# Altium PCB BOOSTXL-DRV8301.PcbDoc
Units mil, origin at the board's own origin, x right, y up, seen from the top; angles counter-clockwise.
Board outline 2200 x 2300 mil, 2 copper layers (Top, Bottom), stack 61.9 mil thick; 114 components, 81 nets, 348 pads, 370 vias.
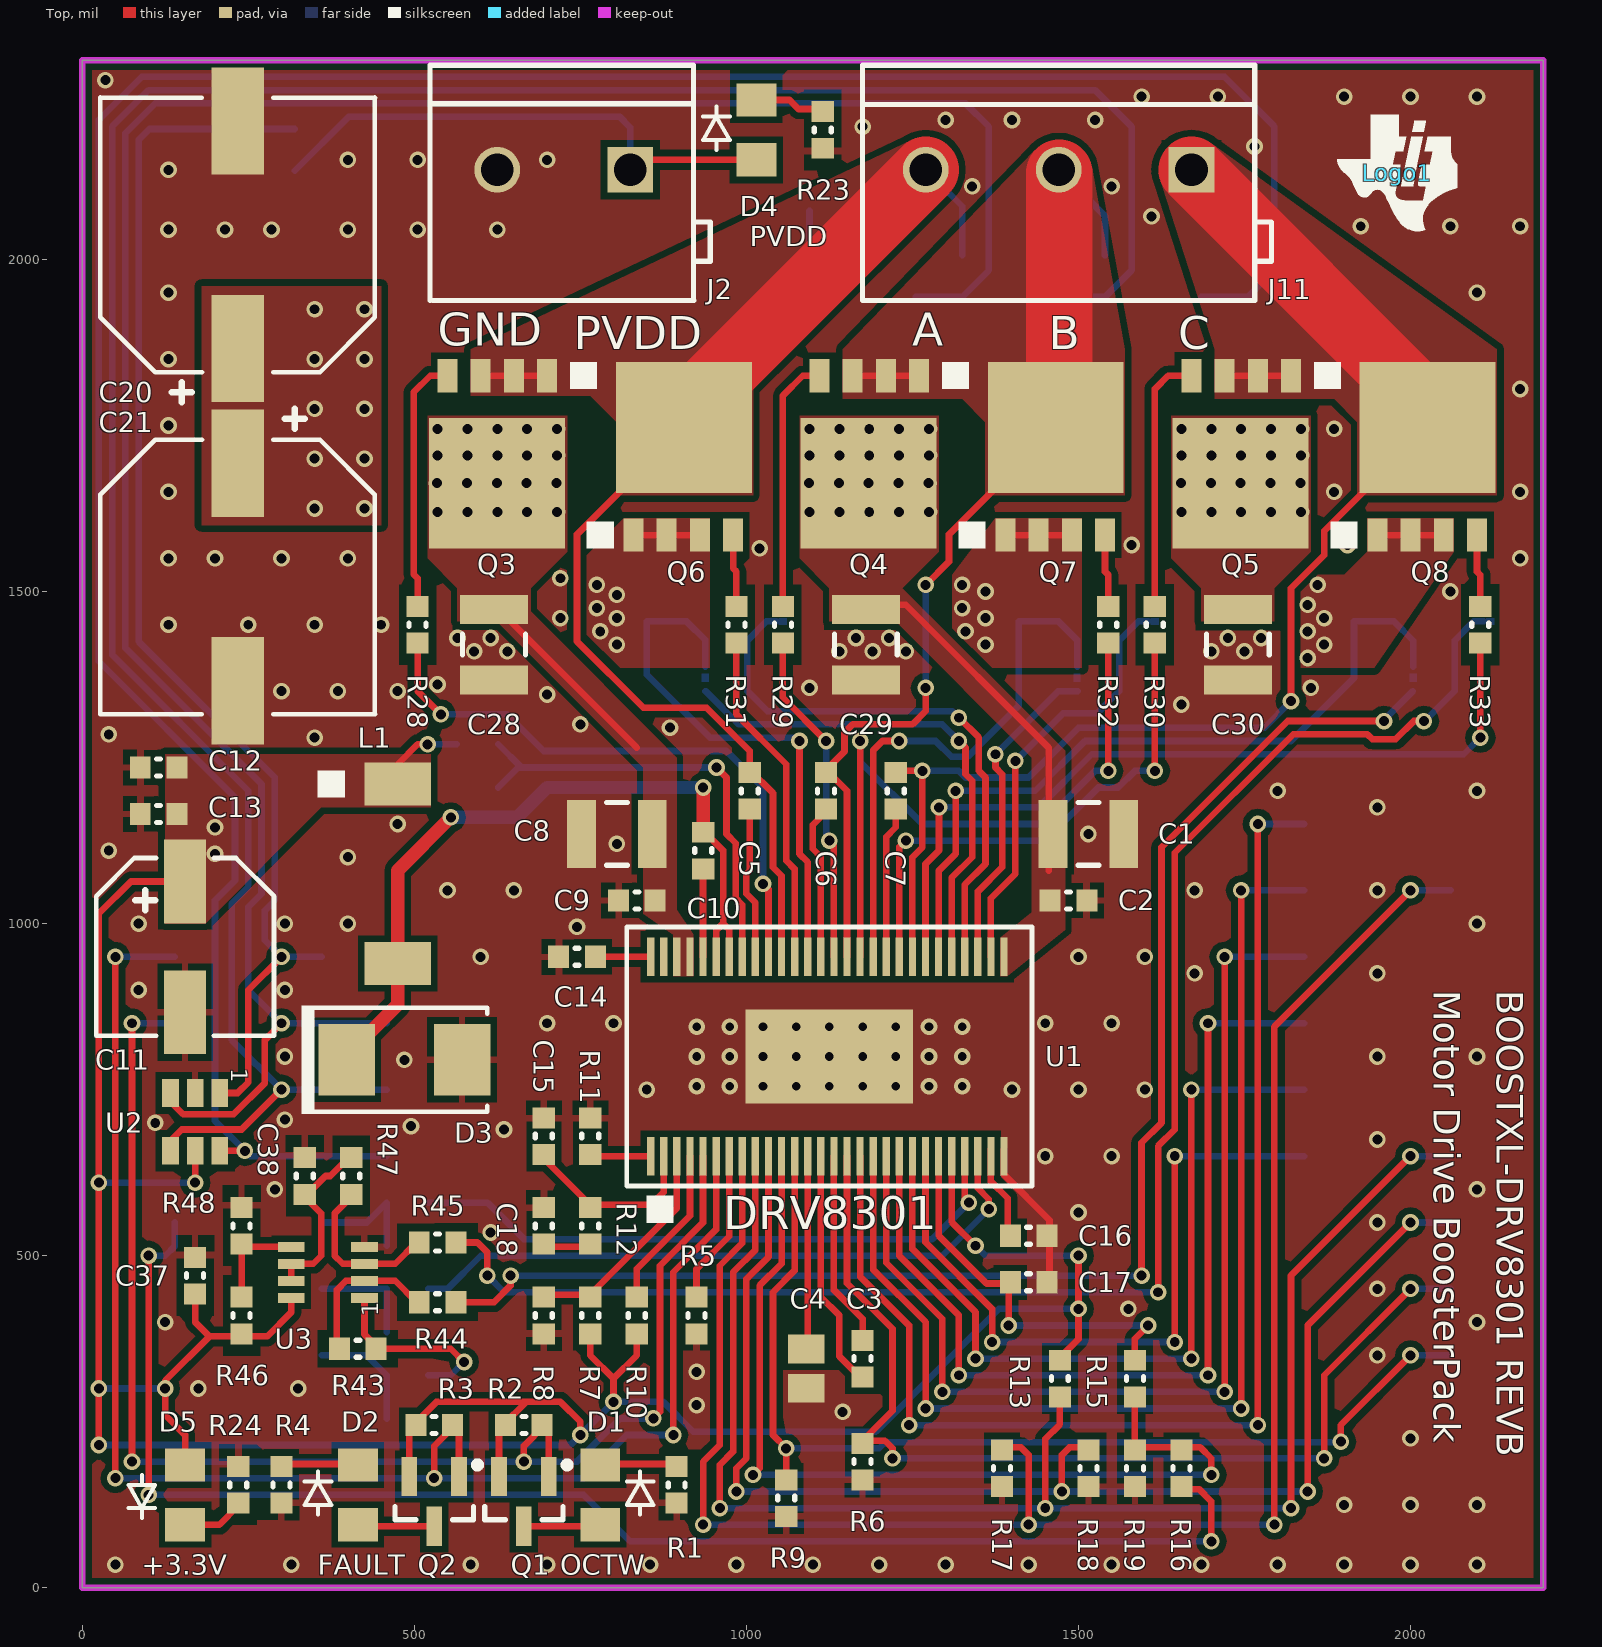
[diagram p0: Top view]
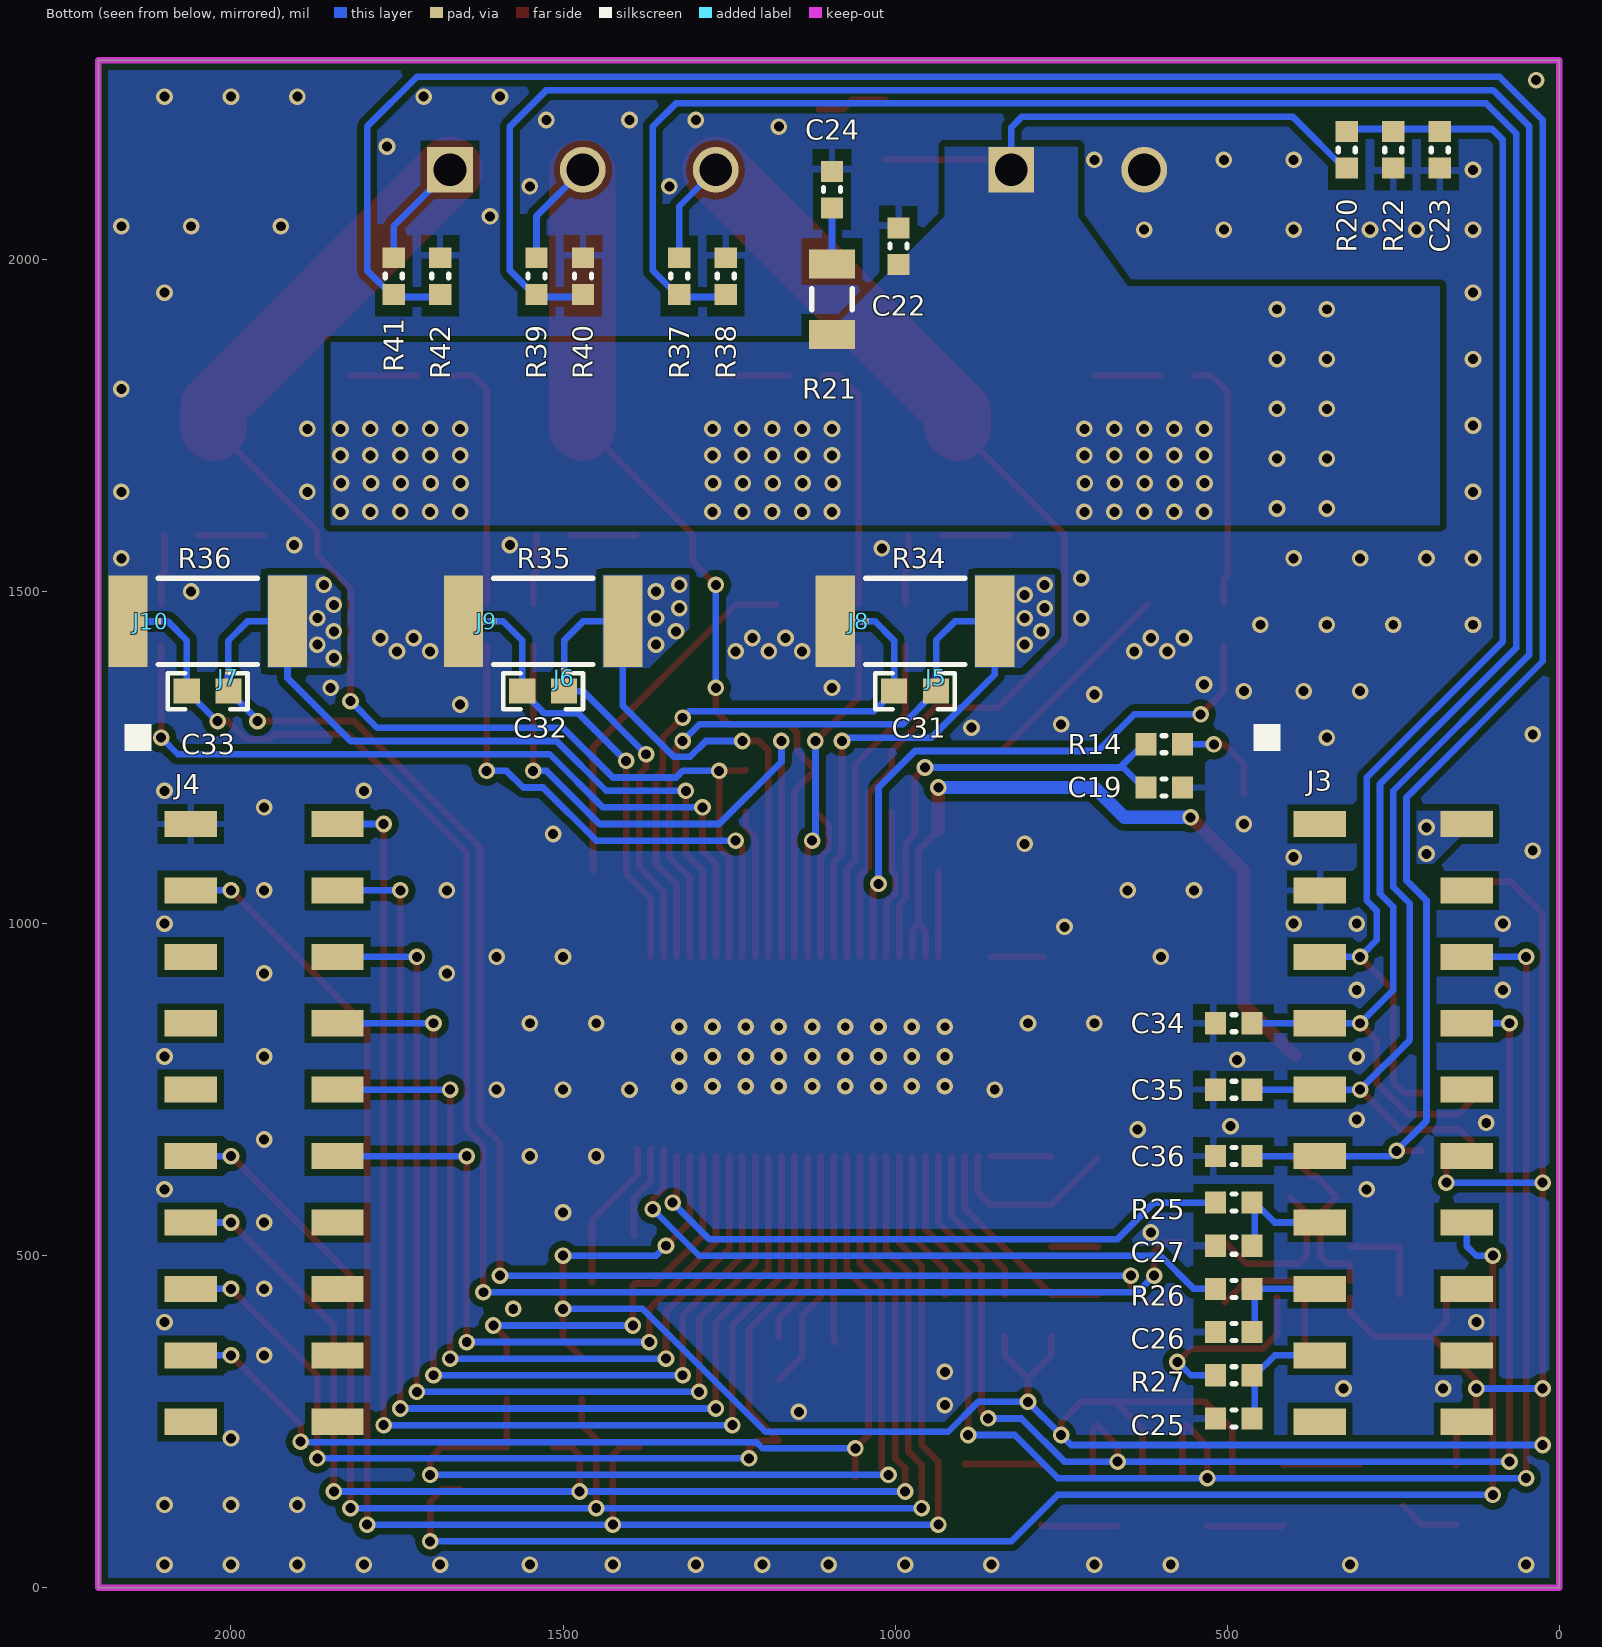
[diagram p1: Bottom view, seen from below]

## Layer stack, top to bottom
Top: signal copper 1.35
Dielectric: core 59.2, FR-4, Dk 4.3
Bottom: signal copper 1.35

## Board outline
0,0 0,2300 2200,2300 2200,0

## Design rules (kind name [scope] priority, off if disabled: settings)
Clearance Clearance_Poly_GND [InNamedPolygon('GND_TOP') or InNamedPolygon('GND_BOT')] p1: gap=10
Clearance "'Default' PADS rule_18" [All] p2: gap=6
Clearance "'Default' PADS rule_15" [IsVia vs IsVia] p3: gap=6
ComponentClearance "'Default' PADS rule_12" [All] p1: gap=0 collisioncheckmode=3 verticalgap=0 showdistances=FALSE
DiffPairsRouting [All] p1: maxlimit=10 minlimit=10 mostfreqgap=10 maxuncoupledlength=500
FlightTimeFalling "'Default' PADS rule_10" [All] p1: maximum=10.00
FlightTimeRising "'Default' PADS rule_9" [All] p1: maximum=10.00
MaxMinImpedance "'Default' PADS rule_8" [All] p1: minimum=50.00 maximum=150.0
MinimumSolderMaskSliver [All] p1: minsoldermaskwidth=4
PlaneClearance "'Default' PADS rule_14" [All] p1: clearance=15
PolygonConnect PolygonConnect_1 [IsNamedPolygon('GND_Top') or IsNamedPolygon('GND_Bot') vs Not (InComponent('U1') or InComponent('J2') or InComponent('J11') or InComponent('J1') or InComponent('J5') or InComponent('J6') or InComponent('J7') or InComponent('J8') or InComponent('J9') or InComponent('J10') or InComponent('C1') or InComponent('C4') or InComponent('C8') or InComponent('C16') or InComponent('C17') or InComponent('C20') or InComponent('C21') or InComponent('C28') or InComponent('C29') or InComponent('C30') or InComponent('R34') or InComponent('R35') or InComponent('R36') or IsStitchingVia or IsVia)] p1: connectstyle=Relief reliefconductorwidth=10 reliefentries=4 polygonreliefangle="90 Angle" airgapwidth=10
PolygonConnect [All] p2: connectstyle=Direct reliefconductorwidth=10 reliefentries=4 polygonreliefangle="90 Angle" airgapwidth=10
RoutingLayers "'Default' PADS rule_3" [All] p1: top layer_v5=TRUE bottom layer_v5=TRUE
RoutingPriority "'Default' PADS rule_2" [All] p1: routingpriority=3
RoutingTopology "'Default' PADS rule" [All] p1: topology=Shortest
RoutingVias "'Default' PADS rule_4" [All] p1: holewidth=15 width=25 viastyle="Through Hole" minholewidth=10 minwidth=15 maxholewidth=25 maxwidth=60
SMDToCorner "'Default' PADS rule_16" [All] p1: distance=0
SMDToPlane "'Default' PADS rule_17" [All] p1: distance=80000
SilkToSilkClearance [All] p1: silktosilkclearance=5
SilkscreenOverComponentPads [All] p1: minsilkscreentomaskgap=3
SolderMaskExpansion "Solder Mask Expansion from CAM settings" [All] p1: expansion=2
Width "'Default' PADS rule_13" [All] p1: maxlimit=150 minlimit=10 preferedwidth=10
19 further rules are at their usual default settings.

## Classes and differential pairs
component class DRV8301: C1 C2 C3 C4 C5 C6 C7 C8 C9 C10 C11 C12 C13 C14 C15 C16 C17 C18 C19 D1 D2 D3 L1 Logo1 Q1 Q2 R1 R2 R3 R4 R5 R6 R7 R8 R9 R10 R11 R12 R13 R14 R15 R16 R17 R18 R19 U1
component class LAUNCHPAD: C20 C21 C22 C23 C24 C25 C26 C27 D4 D5 J2 J3 J4 R20 R21 R22 R23 R24 R25 R26 R27 U2
component class MOTOR: C28 C29 C30 C31 C32 C33 J5 J6 J7 J8 J9 J10 J11 Q3 Q4 Q5 Q6 Q7 Q8 R28 R29 R30 R31 R32 R33 R34 R35 R36
component class SENSE: C34 C35 C36 C37 C38 R37 R38 R39 R40 R41 R42 R43 R44 R45 R46 R47 R48 U3
differential pair C_ISENSE: +C_ISENSE_P -C_ISENSE_N
differential pair A_ISENSE: +A_ISENSE_P -A_ISENSE_N
differential pair B_ISENSE: +B_ISENSE_P -B_ISENSE_N

## Components (designator, comment, footprint, x,y, rotation, side; value= is the part's Value field where it differs from the comment)
C1 "GRM32ER72A225KA35L" 1210L 1515,1135 r0 top
C2 "GRM188R72A104KA35D" 0603L 1485,1035 r0 top
C3 "C1608X7R1H223K" 0603L 1175,345 r90 top
C4 "GRM219R61E225KA12D" 0805L 1090,330 r270 top
C5 "C1608X7R1H104K" 0603L 1005,1200 r90 top
C6 "C1608X7R1H104K" 0603L 1120,1200 r90 top
C7 "C1608X7R1H104K" 0603L 1225,1200 r90 top
C8 "GRM32ER72A225KA35L" 1210L 805,1135 r180 top
C9 "GRM188R72A104KA35D" 0603L 835,1035 r180 top
C10 "C1608X7R1H104K" 0603L 935,1110 r270 top
C11 "EEE-FK1E470P" SM_RADIAL_D 155,965 r270 top
C12 "C1608X7R1E104K" 0603L 115,1235 r180 top
C13 "C1608X5R1E105K080AC" 0603L 115,1165 r180 top
C14 "GRM188R71H153KA01D" 0603L 745,950 r180 top
C15 "GRM1885C1H121JA01D" 0603L 695,680 r90 top
C16 "GRM188R61E105KA12D" 0603L 1425,530 r0 top
C17 "GRM188R61E105KA12D" 0603L 1425,460 r0 top
C18 "GRM188R71H682KA01D" 0603L 695,545 r90 top
C19 "C1608X7R1E104K" 0603L 595,1205 r180 bottom
C20 "EEE-FC1H221P" SM_RADIAL_G 234,2037 r90 top
C21 "EEE-FC1H221P" SM_RADIAL_G 234,1522 r270 top
C22 "GRM188R72A104KA35D" 0603L 995,2020 r90 bottom
C23 "C0603C104J4RACTU" 0603L 180,2165 r270 bottom
C24 "C1608X7R2A103K" 0603L 1095,2105 r90 bottom
C25 "GRM188R71C222KA01D" 0603L 490,255 r0 bottom
C26 "GRM188R71C222KA01D" 0603L 490,385 r0 bottom
C27 "GRM188R71C222KA01D" 0603L 490,515 r0 bottom
C28 "GRM32ER72A225KA35L" 1210L 620,1420 r270 top
C29 "GRM32ER72A225KA35L" 1210L 1180,1420 r270 top
C30 "GRM32ER72A225KA35L" 1210L 1740,1420 r270 top
C31 "C0603C102J5GAC" 0603 970,1350 r0 bottom
C32 "C0603C102J5GAC" 0603 1530,1350 r0 bottom
C33 "C0603C102J5GAC" 0603 2035,1350 r0 bottom
C34 "C0603C104J4RACTU" 0603L 490,850 r0 bottom
C35 "C0603C104J4RACTU" 0603L 490,750 r0 bottom
C36 "C0603C104J4RACTU" 0603L 490,650 r0 bottom
C37 "C0603C104J4RACTU" 0603L 170,470 r90 top
C38 "C0603C225M8PACTU" 0603L 335,620 r90 top
D1 "D-LED_0805" LED_0805 780,140 r270 top
D2 "D-LED_0805" LED_0805 415,140 r270 top
D3 "CDBB2100-G" SMB 485,795 r0 top
D4 "D-LED_0805" LED_0805 1015,2195 r270 top
D5 "D-LED_0805" LED_0805 155,140 r90 top
J2 "TERM_BLK_2PIN" CONN_ED120-2DS 725,2135 r90 top
J3 "HEADER_NPTC202KFM" HEADER_NPTC202KFM 250,700 r270 bottom
J4 "HEADER_NPTC202KFM" HEADER_NPTC202KFM 1950,700 r270 bottom
J5 "Net-Tie" Net-Tie_10mil 938,1370 r270 bottom net-tie
J6 "Net-Tie" Net-Tie_10mil 1498,1370 r270 bottom net-tie
J7 "Net-Tie" Net-Tie_10mil 2004,1370 r270 bottom net-tie
J8 "Net-Tie" Net-Tie_10mil 1055,1455 r180 bottom net-tie
J9 "Net-Tie" Net-Tie_10mil 1615,1455 r180 bottom net-tie
J10 "Net-Tie" Net-Tie_10mil 2120,1455 r180 bottom net-tie
J11 "TERM_BLK_3PIN" CONN_ED120_3DS 1470.2,2135 r270 top
L1 "DR74-330-R" IND_DR74 475,1075 r0 top
Logo1 "Texas Instruments" TI_Symbol_Overlay_Small 1980,2130 r0 top
Q1 "TR_PFET_SOT23" SOT-23 665,130 r270 top
Q2 "TR_PFET_SOT23" SOT-23 530,130 r270 top
Q3 "TR-CSD18533Q5A" QFN5X6MM 625,1710 r180 top
Q4 "TR-CSD18533Q5A" QFN5X6MM 1185,1710 r180 top
Q5 "TR-CSD18533Q5A" QFN5X6MM 1745,1710 r180 top
Q6 "TR-CSD18533Q5A" QFN5X6MM 905,1700 r0 top
Q7 "TR-CSD18533Q5A" QFN5X6MM 1465,1700 r0 top
Q8 "TR-CSD18533Q5A" QFN5X6MM 2025,1700 r0 top
R1 "CRCW0603330RJNEA" 0603L 895,155 r90 top
R2 "CRCW060310K0JNEA" 0603L 665,245 r180 top
R3 "CRCW060310K0JNEA" 0603L 530,245 r180 top
R4 "CRCW0603330RJNEA" 0603L 300,155 r90 top
R5 "CRCW06031R00JNEA" 0603L 925,410 r90 top
R6 "CRCW06031K00JNEA" 0603L 1175,190 r90 top
R7 "CRCW060331K6FKEA" 0603L 765,410 r270 top
R8 "RG1608P-103-B-T5" 0603L 695,410 r90 top
R9 "CRCW06031K00JNEA" 0603L 1060,135 r90 top
R10 "CRCW060310K0JNEA" 0603L 835,410 r270 top
R11 "CRCW0603205KFKEA" 0603L 765,680 r270 top
R12 "CRCW060316K2FKEA" 0603L 765,545 r90 top
R13 "CRCW060310K0JNEA" 0603L 1472,315 r90 top
R14 "CRCW06030000Z0EA" 0603L 595,1270 r180 bottom
R15 "CRCW0603100KJNEA" 0603L 1585,315 r270 top
R16 "CRCW06030000Z0EA" 0603L 1655,180 r90 top
R17 "CRCW060310K0JNEA" 0603L 1385,180 r90 top
R18 "CRCW060310K0JNEA" 0603L 1515,180 r90 top
R19 "CRCW06033K00JNEA" 0603L 1585,180 r90 top
R20 "CRCW060334K8FKEA" 0603L 320,2165 r270 bottom
R21 "CRCW12063R30JNEA" 1206L 1095,1940 r270 bottom
R22 "CRCW06034K99FKEA" 0603L 250,2165 r90 bottom
R23 "CRCW06034K99FKEA" 0603L 1115,2195 r90 top
R24 "CRCW0603330RJNEA" 0603L 235,155 r270 top
R25 "CRCW060356R0JNEA" 0603L 490,580 r0 bottom
R26 "CRCW060356R0JNEA" 0603L 490,450 r0 bottom
R27 "CRCW060356R0JNEA" 0603L 490,320 r0 bottom
R28 "CRCW060310R0JNEA" 0603L 505,1450 r90 top
R29 "CRCW060310R0JNEA" 0603L 1055,1450 r90 top
R30 "CRCW060310R0JNEA" 0603L 1615,1450 r90 top
R31 "CRCW060310R0JNEA" 0603L 985,1450 r90 top
R32 "CRCW060310R0JNEA" 0603L 1545,1450 r90 top
R33 "CRCW060310R0JNEA" 0603L 2105,1450 r90 top
R34 "CRA2512-FZ-R010ELF" 2512M 970,1455 r180 bottom
R35 "CRA2512-FZ-R010ELF" 2512M 1530,1455 r180 bottom
R36 "CRA2512-FZ-R010ELF" 2512M 2035,1455 r180 bottom
R37 "CRCW060334K8FKEA" 0603L 1325,1975 r270 bottom
R38 "CRCW06034K99FKEA" 0603L 1255,1975 r270 bottom
R39 "CRCW060334K8FKEA" 0603L 1540,1975 r270 bottom
R40 "CRCW06034K99FKEA" 0603L 1470,1975 r270 bottom
R41 "CRCW060334K8FKEA" 0603L 1755,1975 r270 bottom
R42 "CRCW06034K99FKEA" 0603L 1685,1975 r270 bottom
R43 "RG1608P-103-B-T5" 0603L 415,360 r0 top
R44 "CRCW06031K00FKEA" 0603L 535,430 r180 top
R45 "CRCW06031K00FKEA" 0603L 535,520 r180 top
R46 "RG1608P-103-B-T5" 0603L 240,410 r270 top
R47 "CRCW060310K0JNEA" 0603L 405,620 r270 top
R48 "RG1608P-103-B-T5" 0603L 240,545 r270 top
U1 "DRV8301DCA" DCA_56P 1125,800 r90 top
U2 "NUP4201MR6" SOT23-6 170,700 r270 top
U3 "OPA2374AIDCN" DCN 370,475 r180 top

## Footprints (in the part's own frame and the unit in brackets; to place one, negate y for a bottom-side part, rotate by r counter-clockwise, add the part's x,y. Pads: shape width x height; smd on the part's side, far side on the other; paste and mask are expansions set on the pad)
0603 [mm] "0603 from SM-752 data"
  rect 1x0.95 smd: 1(-0.8,0) 2(0.8,0)
  silkscreen extent -1.52,-0.69 1.52,0.69, body extent -0.87,-0.47 0.87,0.47, height 0.85
0603L [mm] "0603 from SM-752 data"
  rect 0.8x0.85 smd: 1(-0.7,0) 2(0.7,0)
  silkscreen extent -0.07,-0.33 0.07,0.33, body extent -0.87,-0.47 0.87,0.47, height 0.85
0805L [mm] "0805 from SM-752 data"
  rect 1.1x1.4 smd: 1(-0.75,0) 2(0.75,0)
  body extent -1.1,-0.72 1.1,0.72, height 1.1
1206L [mm] "1206 from SM-752 data"
  rect 1.1x1.75 smd: 1(-1.35,0) 2(1.35,0)
  silkscreen extent -0.4,-0.77 0.4,0.77, body extent -1.7,-0.9 1.7,0.9, height 1.35
1210L [mm] "1210 from SM-752 data"
  rect 1.1x2.6 smd: 1(-1.35,0) 2(1.35,0)
  silkscreen extent -0.4,-1.2 0.4,1.2, body extent -1.7,-1.35 1.7,1.35, height 1.35
2512M [mm] "Chip Resistor, Body 6.3x3.2mm, IPC Low Density"
  rect 1.5x3.5 smd: 1(-3.05,0) 2(3.05,0)
  silkscreen extent -1.9,-1.65 1.9,1.65, body extent -3.22,-1.67 3.22,1.67, height 0.71
CONN_ED120-2DS [mm] "ONSHORE"
  rect 1.75x1.75 hole 1.25: 1(0,-2.54)
  round 1.75 hole 1.25: 2(0,2.54)
  silkscreen extent -5,-5.6 4,5.12, body extent -5,-5.6 4.15,5.12, height 13.1
CONN_ED120_3DS [mm] "ONSHORE"
  rect 1.75x1.75 hole 1.25: 1(0,5.08)
  round 1.75 hole 1.25: 2(0,0) 3(0,-5.08)
  silkscreen extent -4,-7.5 5,8.14, body extent -4.13,-7.55 5.05,8.14, height 13.1
DCA_56P [mil]
  rect 58x11 smd mask+2: 1(-150.08,268.98) 2(-150.08,249.3) 3(-150.08,229.61) 4(-150.08,209.91) 5(-150.08,190.21) 6(-150.08,170.51) 7(-150.08,150.81) 8(-150.08,131.11) 9(-150.08,111.41) 10(-150.08,91.71) 11(-150.08,72.01) 12(-150.08,52.31) 13(-150.08,32.61) 14(-150.08,12.91) 15(-150.08,-6.79) 16(-150.08,-26.49) 17(-150.08,-46.19) 18(-150.08,-65.89) 19(-150.08,-85.59) 20(-150.08,-105.29) 21(-150.08,-124.99) 22(-150.08,-144.69) 23(-150.08,-164.39) 24(-150.08,-184.09) 25(-150.08,-203.79) 26(-150.08,-223.49) 27(-150.08,-243.17) 28(-150.08,-262.86) 29(149.92,-262.86) 30(149.92,-243.17) 31(149.92,-223.49) 32(149.92,-203.79) 33(149.92,-184.09) 34(149.92,-164.39) 35(149.92,-144.69) 36(149.92,-124.99) 37(149.92,-105.29) 38(149.92,-85.59) 39(149.92,-65.89) 40(149.92,-46.19) 41(149.92,-26.49) 42(149.92,-6.79) 43(149.92,12.91) 44(149.92,32.61) 45(149.92,52.31) 46(149.92,72.01) 47(149.92,91.71) 48(149.92,111.41) 49(149.92,131.11) 50(149.92,150.81) 51(149.92,170.51) 52(149.92,190.21) 53(149.92,209.91) 54(149.92,229.61) 55(149.92,249.3) 56(149.92,268.98)
  rect 141.73x251.97 smd: 57(0.02,0.01)
  silkscreen extent -250,235 -210,275
DCN [mil]
  rect 40x15 smd: 1(-55,38.4) 2(-55,12.8) 3(-55,-12.8) 4(-55,-38.4) 5(55,-38.4) 6(55,-12.8) 7(55,12.8) 8(55,38.4)
HEADER_NPTC202KFM [mm]
  rect 1x2 smd paste+0.033 mask+0.041: 1(-11.43,-2.807) 2(-11.43,2.807) 3(-8.89,-2.807) 4(-8.89,2.807) 5(-6.35,-2.807) 6(-6.35,2.807) 7(-3.81,-2.807) 8(-3.81,2.807) 9(-1.27,-2.807) 10(-1.27,2.807) 11(1.27,-2.807) 12(1.27,2.807) 13(3.81,-2.807) 14(3.81,2.807) 15(6.35,-2.807) 16(6.35,2.807) 17(8.89,-2.807) 18(8.89,2.807) 19(11.43,-2.807) 20(11.43,2.807)
  silkscreen extent -15.24,-5.33 -14.22,-4.32
IND_DR74 [mil]
  rect 100x65 smd: 1(0,135) 2(0,-135)
  silkscreen extent -120,115 -80,155
LED_0805 [mil]
  rect 50x60 smd: 1(-45,0) 2(45,0)
  silkscreen extent -35,40 30,80
Net-Tie_10mil [mil] "10mil net tie, no solder mask opening, no solder paste"
  rect 10x10 smd paste-5 mask-5: 1(-10,0) 2(10,0)
  Top region: -6,5 6,5 6,-5 -6,-5
QFN5X6MM [mil]
  rect 30x50 smd paste+1.5 mask+1.5: 1(-75,-115) 2(-25,-115) 3(25,-115) 4(75,-115)
  rect 204.72x196.85 smd paste+0.64 mask+0.64: 5(0.79,46.85)
  silkscreen extent -150,-135 -110,-95
SM_RADIAL_D [mm] "6.3 x 5.8mm:  Panasonic D"
  rect 3.2x1.6 smd: 1(-2.5,0) 2(2.5,0)
  silkscreen extent -3.4,-3.4 3.4,3.4, body extent -3.41,-3.41 3.41,3.41, height 6.1
SM_RADIAL_G [mm] "10 x 10.2mm:  Panasonic G"
  rect 4.1x2 smd: 1(-4.35,0) 2(4.35,0)
  silkscreen extent -5.25,-5.25 5.25,5.25, body extent -5.26,-5.26 5.26,5.26, height 10.5
SMB [mil] "Molded Diode, 2-Leads, Body 5.4x3.6mm, IPC Medium Density, based on OnSemi component dimensions"
  rect 85x107.99 smd: 1(-87.01,0) 2(87.01,0)
  silkscreen extent -155,-82 125,82, body extent -106,-71 106,71, height 91
SOT23-6 [mil]
  rect 42x25 smd: 1(-45,37) 2(-45,0) 3(-45,-37) 4(42,-37) 5(42,0) 6(42,37)
SOT-23 [mm] "SOT23, 3-Leads, Body 2.9x1.3mm, Pitch 0.95mm, Lead Span 2.5mm, IPC Medium Density"
  rect 1.5x0.6 smd: 1(-0.95,0.95) 2(-0.95,-0.95) 3(0.95,0)
  silkscreen extent -1.52,-1.5 0.7,1.78, body extent -1.16,-1.45 1.21,1.45, height 1
TI_Symbol_Overlay_Small [mil]
  silkscreen extent -90,-88 91,88

## Part data
C1 C8 C28 C29 C30: "CAP, CERM, 2.2uF, 100V, +/-10%, X7R, 1210"
C2 C9 C22: "CAP, CERM, 0.1uF, 100V, +/-10%, X7R, 0603"
C3: "CAP, CERM, 0.022uF, 50V, +/-10%, X7R, 0603"
C4: "CAP, CERM, 2.2uF, 25V, +/-10%, X5R, 0805"
C5 C6 C7 C10: "CAP, CERM, 0.1uF, 50V, +/-10%, X7R, 0603"
C11: "CAP, AL, 47uF, 25V, +/-20%, 0.36 ohm, SMD"
C12 C19: "CAP, CERM, 0.1uF, 25V, +/-10%, X7R, 0603"
C13 C16 C17: "CAP, CERM, 1uF, 25V, +/-10%, X5R, 0603"
C14: "CAP, CERM, 0.015uF, 50V, +/-10%, X7R, 0603"
C15: "CAP, CERM, 120pF, 50V, +/-5%, C0G/NP0, 0603"
C18: "CAP, CERM, 6800pF, 50V, +/-10%, X7R, 0603"
C20 C21: "CAP, AL, 220uF, 50V, +/-20%, 0.3 ohm, SMD"
C23 C34 C35 C36 C37: "CAP, CERM, 0.1uF, 16V, +/-5%, X7R, 0603"
C24: "CAP, CERM, 0.01uF, 100V, +/-10%, X7R, 0603"
C25 C26 C27: "CAP, CERM, 2200pF, 16V, +/-10%, X7R, 0603"
C31 C32 C33: "CAP, CERM, 1000pF, 50V, +/-5%, C0G/NP0, 0603"
C38: "CAP, CERM, 2.2uF, 10V, +/-20%, X5R, 0603"
D1: "LED THIN 585NM YEL DIFF 0805 SMD"
D2: "LED THIN660NM SUPRED DIFF0805SMD"
D3: library part CDBC5100-G, "Diode, Schottky, 100V, 2A, SMB"
D4 D5: "LED THIN 565NM GRN DIFF 0805 SMD"
J2: library part ED120/2DS, "TERMINAL BLOCK 5.08MM VERT 2POS"
J3 J4: "CONN RCPT 20POS .100 DL STR SMD"
J5 J6 J7 J8 J9 J10: "Single point connection between nets."
J11: library part ED120/3DS, "TERMINAL BLOCK 5.08MM VERT 3POS"
L1: library part IND_DR74-XXX, "INDUCTOR SHIELD PWR 33UH SMD"
Logo1: library part TI_Logo, "Texas Instrument Corporate Signature"
Q1 Q2: "MOSFET P-CH 8V 5.4A SOT23-3"
Q3 Q4 Q5 Q6 Q7 Q8: "MOSFET, N-Chan, 60V, 18A, 6.1 mOhm"
R1 R4 R24: "RES, 330 ohm, 5%, 0.1W, 0603"
R2 R3 R10 R13 R17 R18 R47: "RES, 10k ohm, 5%, 0.1W, 0603"
R5: "RES, 1.0 ohm, 5%, 0.1W, 0603"
R6 R9: "RES, 1.0k ohm, 5%, 0.1W, 0603"
R7: "RES, 31.6k ohm, 1%, 0.1W, 0603"
R8 R43 R46 R48: "RES, 10.0k ohm, 0.1%, 0.1W, 0603"
R11: "RES, 205k ohm, 1%, 0.1W, 0603"
R12: "RES, 16.2k ohm, 1%, 0.1W, 0603"
R14 R16: "RES, 0 ohm, 5%, 0.1W, 0603"
R15: "RES, 100k ohm, 5%, 0.1W, 0603"
R19: "RES, 3.0k ohm, 5%, 0.1W, 0603"
R20 R37 R39 R41: "RES, 34.8k ohm, 1%, 0.1W, 0603"
R21: "RES, 3.3 ohm, 5%, 0.25W, 1206"
R22 R23 R38 R40 R42: "RES, 4.99k ohm, 1%, 0.1W, 0603"
R25 R26 R27: "RES, 56 ohm, 5%, 0.1W, 0603"
R28 R29 R30 R31 R32 R33: "RES, 10 ohm, 5%, 0.1W, 0603"
R34 R35 R36: "RES, 0.01 ohm, 1%, 3W, 2512"
R44 R45: "RES, 1.00k ohm, 1%, 0.1W, 0603"
U1: library part DRV8302DCA_ERIC, "IC, 3 Phase Pre-Driver with Dual Current Shunt Amplifiers and Buck Regulator-Hardware Controlled"
U2: "IC,  500w 6v, Transient Voltage  Suppressors"
U3: "IC, CMOS, R-R I/O  Op Amp, Single Supply, 6.5MHz, 585uA"

## Via types
v1: diameter 25, hole 15, Top to Bottom, tented both sides, 343 vias
v2: diameter 25, hole 13, Top to Bottom, tented both sides, 27 vias

## Nets (pads, with @x,y where several pads share a name; then routed paths per layer and width w, separated by ;. In a path a pad name is that pad's centre, name@x,y a point inside that pad or via, vN(x,y) a via of type N, cw(c..) or ccw(c..) an arc to the next point about the centre after c; other vN are vias at no path point)
+3.3V: C11.1 C12.1 C13.1 C37.1 D5.2 J3.2 L1.1 Q1.2 Q2.2 R2.2 R3.2 R7.2 R10.2 R13.2 R14.2 R46.2 U1.24 U2.5 U3.8 | length 4623.9
  Top w10: v1(25,215) v1(25,300) v1(25,610) 25,1015 73.43,1063.43 C11.1 ; D5.2 155,230 125,260 v1(125,300) 125,312.01 191.5,378.5 ; C37.1@170,438.5 170,400 191.5,378.5 ; v1(170,610) U2.5 ; U3.8 315,415 278.5,378.5 240,378.5 191.5,378.5 ; L1.1@475,1195 475,1240 505,1270 v1(520,1270) ; Q2.2 492.6,239.09 498.5,245 533.5,280 668.5,280 ; Q1.2 627.6,239.09 633.5,245 668.5,280 ; v1(750,230) 750,250 720,280 668.5,280 ; R7.2@765,378.5 765,350 800,315 ; v1(800,280) 800,315 ; R10.2@835,378.5 835,350 800,315 ; U1.24 1309.09,550.91 v1(1345,515) ; R13.2@1472,346.5 1500,374.5 v1(1500,420) v1(1500,500)
  Bottom w10: v1(25,215) 735,215 v1(750,230) v1(800,280) 875,280 920,235 1195,235 1380,420 v1(1500,420) ; v1(25,300) v1(125,300) ; v1(25,610) v1(170,610) ; v1(520,1270) R14.2@563.5,1270 ; v1(1345,515) 1360,500 v1(1500,500)
  other v1: 200,1105 200,1145
+PVDD: C1.1 C2.1 C8.1 C9.1 C20.1 C21.1 C22.1 C28.1 C29.1 C30.1 D4.2 J2.1 Q3.5 Q4.5 Q5.5 R20.2 R21.2 U1.29 U1.53 U1.54 | length 1658.7
  Top w10: C28.1@620,1480 621.46,1478.54 835,1265 ; J2.1 840,2150 D4.2 ; C29.1@1180,1480 1240,1480 1455,1265 1455,1095 1455,1080
  Bottom w10: R20.2@320,2133.5 401.5,2215 809,2215 825,2199 J2.1
  other v1: 535,1620 580,1620 625,1620 670,1620 715,1620 1095,1620 1140,1620 1185,1620 1230,1620 1275,1620 1655,1620 1700,1620 1745,1620 1790,1620 1835,1620 350,1625 425,1625 534.21,1663.15 579.21,1663.15 624.21,1663.15 669.21,1663.15 714.21,1663.15 1094.21,1663.15 1139.21,1663.15 1184.21,1663.15 1229.21,1663.15 1274.21,1663.15 1654.21,1663.15 1699.21,1663.15 1744.21,1663.15 1789.21,1663.15 1834.21,1663.15 350,1700 425,1700 535,1705 580,1705 625,1705 670,1705 715,1705 1095,1705 1140,1705 1185,1705 1230,1705 1275,1705 1655,1705 1700,1705 1745,1705 1790,1705 1835,1705 535,1745 580,1745 625,1745 670,1745 715,1745 1095,1745 1140,1745 1185,1745 1230,1745 1275,1745 1655,1745 1700,1745 1745,1745 1790,1745 1835,1745 350,1775 425,1775 350,1850 425,1850 350,1925 425,1925
\FAULT: J3.6 Q2.1 R3.1 U1.6 | length 2361.1
  Top w10: v1(50,165) v1(50,950) ; v1(530,165) 530,213.5 561.5,245 567.4,239.09 Q2.1 ; v1(890,230) 890,475 954.5,539.5 954.5,604.9 U1.6
  Bottom w10: v1(50,165) v1(530,165) 755,165 820,230 v1(890,230) ; v1(50,950) J3.6
\OCTW: J3.8 Q1.1 R2.1 U1.5 | length 2110.4
  Top w10: v1(75,190) v1(75,850) ; v1(665,190) 665,213.5 696.5,245 702.4,239.09 Q1.1 ; v1(860,255) 870,265 870,485 934.8,549.8 U1.5
  Bottom w10: v1(75,190) v1(665,190) 745,190 810,255 v1(860,255) ; v1(75,850) J3.8
A_ISENSE_N: C31.2 J8.2 U1.32 | length 856.5
  Top w10: v1(1320,1310) 1350,1280 1350,1230 1360,1220 1360,1090 1328.79,1058.79 U1.32
  Bottom w10: J8.2 1030,1455 1001.5,1426.5 C31.2 1031.5,1320 1310,1320 v1(1320,1310)
A_ISENSE_P: C31.1 J5.2 U1.33 | length 758.7
  Top w10: U1.33 1309.09,1069.09 1340,1100 1340,1215 1330,1225 1330,1265 v1(1320,1275)
  Bottom w10: C31.1 988.5,1300 1295,1300 v1(1320,1275)
B_ISENSE_N: C32.2 J9.2 U1.30 | length 642.1
  Top w10: U1.30 1368.17,1038.17 ; 1368.19,1038.19 1405,1075 v1(1405,1245)
  Bottom w10: v1(1405,1245) 1476.5,1316.5 1527.99,1316.5 C32.2 1561.5,1426.5 1590,1455 J9.2
B_ISENSE_P: C32.1 J6.2 U1.31 | length 487.2
  Top w10: U1.31 1348.49,1048.49 1385,1085 1385,1225 1375,1235 v1(1375,1255)
  Bottom w10: v1(1375,1255) 1470,1350 C32.1
BIAS/VDD_SPI: C19.1 R14.1 U1.49 | length 691.6
  Top w10: v1(955,1235) 970,1220 970,1135 984,1121 984,1038.37 993.89,1028.48 U1.49
  Bottom w10: C19.1@626.5,1205 656.5,1235 661.5,1235 ; R14.1@626.5,1270 661.5,1235 ; v1(955,1235) 661.5,1235
C_ISENSE_N: C33.2 J10.2 R45.1 | length 2437.4
  Top w10: R45.1@566.5,520 595,520 610,505 v1(610,470) ; v1(1620,445) 1620,665 1645,690 1645,1106.72 1823.28,1285 1935,1285 1942.5,1277.5 1977.5,1277.5 2005,1305 v1(2020,1305)
  Bottom w10: v1(610,470) 635,445 v1(1620,445) ; v1(2020,1305) 2021.5,1305 C33.2 2066.5,1426.5 2095,1455 J10.2
C_ISENSE_P: C33.1 J7.2 R44.1 | length 2188
  Top w10: R44.1@566.5,430 620,430 645,455 v1(645,470) ; v1(1595,470) 1595,670 1625,700 1625,1115 1815,1305 v1(1960,1305)
  Bottom w10: v1(645,470) v1(1595,470) ; v1(1960,1305) 1960,1306.5 C33.1
DC_CAL: J4.17 R9.2 U1.12 | length 1578.1
  Top w10: R9.2@1060,166.5 v1(1060,210) 1040,230 1040,445 1072.69,477.69 U1.12 ; v1(1895,220) 1895,245 v1(2000,350)
  Bottom w10: v1(1060,210) 1200,210 1209.31,219.31 v1@1895,219.31 ; v1(2000,350) J4.17
DC_V_FB: C23.1 J3.5 R20.1 R22.2 U2.1 | length 1893.2
  Top w10: U2.1 234,745 250,761 250,900 v1(300,950)
  Bottom w10: R20.1@320,2196.5 180,2196.5 101.5,2196.5 85,2180 85,1425 290,1220 290,1035 275,1020 275,975 v1(300,950) J3.5
DVDD: C17.1 R15.1 U1.23 | length 583
  Top w10: U1.23 1289.39,530.61 1361.75,458.25 1391.75,458.25 1395,455 v1(1395,395) ; R15.1@1585,346.5 1585,375 v1(1605,395)
  Bottom w10: v1(1395,395) v1(1605,395)
EN_GATE: J4.15 R6.2 U1.16 | length 1559.5
  Top w10: U1.16 1151.49,604.91 1151.5,458.5 1220,390 1220,266.5 1175,221.5 1208.5,221.5 1220,210 v1(1220,195) ; v1(1870,195) 1870,320 v1(2000,450)
  Bottom w10: v1(1220,195) v1(1870,195) ; v1(2000,450) J4.15
GAIN/SDO: J4.13 R18.2 U1.10 | length 2014.4
  Top w10: v1(985,145) 985,180 1000,195 1000,465 1033.3,498.3 1033.3,604.9 U1.10 ; v1(1475,145) 1475,200 1486.5,211.5 R18.2@1515,211.5 ; v1(1845,145) 1845,395 v1(2000,550)
  Bottom w10: v1(985,145) v1(1475,145) v1(1845,145) ; v1(2000,550) J4.13
GH_A: R28.1 U1.47 | length 895.4
  Top w10: R28.1@505,1418.5 505,1350 v1(540,1315) ; U1.47 v1@1033.29,1051.71
  Bottom w10: v1(540,1315) 640,1315 695,1260 970,1260 1025,1205 v1(1025,1060)
GH_B: R29.1 U1.42 | length 500.4
  Top w10: R29.1@1055,1418.5 1055,1340 v1(1120,1275) ; v1(1125,1125) 1131.79,1118.21 U1.42
  Bottom w10: v1(1120,1275) 1120,1130 v1(1125,1125)
GH_C: R30.1 U1.37 | length 772.4
  Top w10: U1.37 1230.29,1115.29 ; v1(1615,1230) R30.1@1615,1418.5
  Bottom w10: v1(1240,1125) 1450,1125 1530,1205 1560,1205 1585,1230 v1(1615,1230)
GL_A: R31.1 U1.45 | length 504.9
  Top w10: R31.1@985,1418.5 985,1315 1060,1240 1060,1095 1072.69,1082.31 U1.45
GL_B: R32.1 U1.40 | length 990.6
  Top w10: U1.40 v1(1171.19,1275) ; v1(1545,1230) R32.1@1545,1418.5
  Bottom w10: v1(1171.19,1275) 1171.19,1243.81 1265,1150 1445,1150 1525,1230 v1(1545,1230)
GL_C: R33.1 U1.35 | length 1230.5
  Top w10: U1.35 1269.69,1089.69 1290,1110 v1(1290,1175) ; v1(2105,1280) R33.1@2105,1418.5
  Bottom w10: v1(1290,1175) 1440,1175 1520,1255 2080,1255 v1(2105,1280)
GND: C1.2 C2.2 C4.2 C8.2 C9.2 C11.2 C12.2 C13.2 C14.2 C15.2 C16.2 C17.2 C18.2 C19.2 C20.2 C21.2 C22.2 C23.2 C24.2 C25.2 C26.2 C27.2 C28.2 C29.2 C30.2 C34.2 C35.2 C36.2 C37.2 C38.2 D3.2 J2.2 J3.3 J4.1 J8.1 J9.1 J10.1 R1.1 R4.1 R5.1 R6.1 R8.1 R9.1 R11.1 R17.1 R18.1 R19.1 R22.1 R23.1 R24.1 R34.1 R35.1 R36.1 R38.1 R40.1 R42.1 R48.1 U1.28 U1.57 U2.2 U3.4 | length 228.3
  Top w10: U1.28@1387.86,659.92 1387.86,622.14 1456.5,553.5 1456.5,530 C17.2@1456.5,460
  other v1: 50,35 315,35 585,35 700,35 855,35 985,35 1100,35 1200,35 1300,35 1425,35 1550,35 1685,35 1800,35 1900,35 2000,35 2100,35 1900,125 2000,125 2100,125 2000,225 1145,265 925,275 175,300 325,300 925,325 1950,350 125,400 2100,400 1575,420 1950,450 615,535 1950,550 1500,565 290,600 2100,600 1450,650 1550,650 1950,675 635,690 495,695 110,700 305,705 850,750 1400,750 1500,750 1600,750 485,795 305,800 1950,800 2100,800 700,850 800,850 1450,850 1550,850 85,900 305,900 1675,925 1950,925 600,950 1500,950 1600,950 745,995 85,1000 305,1000 400,1000 2100,1000 550,1050 650,1050 1675,1050 1950,1050 400,1100 40,1110 805,1120 1515,1135 475,1150 1950,1175 1800,1200 2100,1200 350,1280 40,1285 885,1295 750,1300 1655,1330 700,1345 300,1350 385,1350 475,1350 1095,1355 1850,1355 535,1360 590,1410 640,1410 1140,1410 1190,1410 1240,1410 1700,1410 1750,1410 565,1430 615,1430 1165,1430 1215,1430 1725,1430 1775,1430 130,1450 250,1450 350,1450 450,1450 720,1460 2060,1500 720,1520 130,1550 200,1550 300,1550 400,1550 2165,1550 1020,1565 1580,1570 1905,1570 130,1650 1885,1650 2165,1650 1885,1745 130,1750 2165,1805 130,1850 130,1950 2100,1950 130,2045 215,2045 285,2045 400,2045 505,2045 625,2045 1925,2050 2060,2050 2165,2050 1610,2065 1340,2110 1550,2110 130,2135 400,2150 505,2150 700,2150 1765,2170 1175,2200 1300,2210 1400,2210 1525,2210 1595,2245 1710,2245 1900,2245 2000,2245 2100,2245 35,2270
  other v2: 925.01,754.98 975.01,754.98 1025.01,754.98 1075.01,754.98 1125,755 1175.01,754.98 1225.01,754.98 1275.01,754.98 1325.01,754.98 925.01,799.98 975.01,799.98 1025.01,799.98 1075.01,799.98 1125,800 1175.01,799.98 1225.01,799.98 1275.01,799.98 1325.01,799.98 925.01,844.98 975.01,844.98 1025.01,844.98 1075.01,844.98 1125,845 1175.01,844.98 1225.01,844.98 1275.01,844.98 1325.01,844.98
IA_FB: R25.2 U1.25 | length 931.6
  Top w10: U1.25 1328.79,586.21 v1(1335,580)
  Bottom w10: R25.2@521.5,580 610,580 665,525 1280,525 v1(1335,580)
IB_FB: R26.2 U1.26 | length 990
  Top w10: U1.26@1348.49,659.92 1348.49,601.51 1365,585 v1(1365,570)
  Bottom w10: R26.2@521.5,450 550,450 600,500 1295,500 v1(1365,570)
M_OC/SDI: J4.11 R13.1 U1.9 | length 2249.8
  Top w10: v1(960,120) 960,185 980,205 980,475 1013.6,508.6 1013.6,604.9 U1.9 ; v1(1450,120) 1450,224 1472,246 R13.1@1472,283.5 ; v1(1820,120) 1820,470 v1(2000,650)
  Bottom w10: v1(960,120) v1(1450,120) v1(1820,120) ; v1(2000,650) J4.11
M_PWM/\SCS: J4.3 R17.2 U1.8 | length 2689.5
  Top w10: v1(935,95) 935,190 960,215 960,485 993.9,518.9 993.9,604.9 U1.8 ; R17.2@1385,211.5 1413.5,211.5 1425,200 v1(1425,95) ; v1(1795,95) 1795,845 v1(2000,1050)
  Bottom w10: v1(935,95) v1(1425,95) v1(1795,95) ; v1(2000,1050) J4.3
NetC3_1: C3.1 U1.14 | length 362.5
  Top w10: U1.14 1112.09,437.91 1140,410 1140,348.5 C3.1@1175,313.5
NetC3_2: C3.2 U1.15 | length 291.3
  Top w10: U1.15 1131.79,448.21 1175,405 C3.2@1175,376.5
NetC4_1: C4.1 U1.13 | length 280.9
  Top w10: C4.1@1090,370 1092.39,372.39 U1.13
NetC5_1: C5.1 U1.48 | length 226.3
  Top w10: C5.1@1005,1168.5 1005,1080 1000,1075 1000,1045 1013.59,1031.41 U1.48
NetC6_1: C6.1 U1.43 | length 231.9
  Top w10: U1.43 1112.09,1100.54 1100,1112.63 1100,1148.5 C6.1@1120,1168.5
NetC7_1: C7.1 U1.38 | length 224.6
  Top w10: U1.38 1210.59,1130.59 1225,1145 C7.1@1225,1168.5
NetC10_2: C10.2 U1.52 | length 128.4
  Top w10: U1.52 C10.2@934.79,1078.29
NetC14_1: C14.1 U1.56 | length 79.4
  Top w10: C14.1@776.58,949.92 U1.56
NetC15_1: C15.1 R12.2 U1.2 | length 271.9
  Top w10: C15.1@695,646.5 765,576.5 856.5,576.5 875.7,595.7 U1.2
NetC16_1: C16.1 U1.27 | length 140.4
  Top w10: U1.27@1368.17,659.92 1368.17,611.83 1393.5,586.5 C16.1@1393.5,530
NetC18_1: C18.1 R12.1 | length 70
  Top w10: C18.1@695,513.5 R12.1@765,513.5
NetC24_1: C24.1 R21.1 | length 76.4
  Bottom w10: R21.1@1095,1997.09 C24.1@1095,2073.5
NetC25_1: C25.1 J3.17 R27.1 | length 175.4
  Bottom w10: J3.17 428.5,350 458.5,320 C25.1@458.5,255
NetC26_1: C26.1 J3.15 R26.1 | length 163
  Bottom w10: J3.15 458.5,450 C26.1@458.5,385
NetC27_1: C27.1 J3.13 R25.1 | length 175.4
  Bottom w10: J3.13 428.5,550 458.5,580 C27.1@458.5,515
NetC38_1: C38.1 R47.1 U3.6 U3.7 | length 270.6
  Top w10: U3.7 U3.6 347.8,487.8 360,500 360,563.5 335,588.5 366.5,620 373.5,620 R47.1@405,651.5
NetD1_1: D1.1 R1.2 | length 115.6
  Top w10: D1.1 781.5,186.5 R1.2@895,186.5
NetD1_2: D1.2 Q1.3 | length 116
  Top w10: Q1.3 777.6,92.6 D1.2
NetD2_1: D2.1 R4.2 | length 115.6
  Top w10: R4.2@300,186.5 413.5,186.5 D2.1
NetD2_2: D2.2 Q2.3 | length 116
  Top w10: D2.2 417.4,92.6 Q2.3
NetD4_1: D4.1 R23.2 | length 105.6
  Top w10: D4.1 1065,2240 1078.5,2226.5 R23.2@1115,2226.5
NetD5_1: D5.1 R24.2 | length 91.8
  Top w10: D5.1 206.5,95 R24.2@235,123.5
NetJ3_14: J3.14 R16.1 | length 2182.7
  Top w10: v1(100,140) v1(100,500) ; R16.1@1655,148.5 1681.5,148.5 1700,130 v1(1700,70)
  Bottom w10: v1(100,140) 755,140 825,70 v1(1700,70) ; v1(100,500) 125,500 139.5,514.5 J3.14
NetQ3_4: Q3.4 R28.2 | length 382.3
  Top w10: R28.2@505,1481.5 505,1520 499,1526 499,1800 524,1825 Q3.4
NetQ4_4: Q4.4 R29.2 | length 380.9
  Top w10: R29.2@1055,1481.5 1055,1795 1085,1825 Q4.4
NetQ5_4: Q5.4 R30.2 | length 386.8
  Top w10: R30.2@1615,1481.5 1615,1805 1635,1825 Q5.4
NetQ6_4: Q6.4 R31.2 | length 105.6
  Top w10: Q6.4 980,1535 985,1530 R31.2@985,1481.5
NetQ7_4: Q7.4 R32.2 | length 105.6
  Top w10: Q7.4 1540,1530 1545,1525 R32.2@1545,1481.5
NetQ8_4: Q8.4 R33.2 | length 105.6
  Top w10: Q8.4 2100,1530 2105,1525 R33.2@2105,1481.5
NetR5_2: R5.2 U1.7 | length 228.8
  Top w10: R5.2@925,441.5 925,480 974.19,529.19 U1.7
NetR7_1: R7.1 R8.2 U1.3 | length 332.4
  Top w10: R8.2@695,441.5 765,441.5 895.39,571.89 U1.3
NetR10_1: R10.1 U1.4 | length 241.6
  Top w10: R10.1@835,441.5 835,480 915.09,560.09 U1.4
NetR11_2: R11.2 U1.1 | length 91.6
  Top w10: R11.2@765,648.5 766.42,649.92 U1.1
NetR27_2: R27.2 R43.2 U3.1 | length 284.1
  Top w10: U3.1 425,381.5 446.5,360 555,360 v1(575,340)
  Bottom w10: R27.2@521.5,320 555,320 v1(575,340)
NetR43_1: R43.1 R44.2 U3.2 | length 227.5
  Top w10: R43.1@383.5,360 383.5,448.5 397.2,462.2 U3.2 471.3,462.2 R44.2@503.5,430
NetR45_2: R45.2 R47.2 U3.3 | length 240.8
  Top w10: R47.2@405,588.5 380,563.5 380,500 392.2,487.8 U3.3 471.3,487.8 R45.2@503.5,520
NetR46_1: R46.1 R48.2 U3.5 | length 146.9
  Top w10: R46.1@240,441.5 240,513.5 U3.5@314.9,513.5
OC_ADJ/SCLK: R15.2 R16.2 R19.2 U1.11 | length 1406.6
  Top w10: v1(1010,170) 1020,180 1020,455 1053,488 1053,604.9 U1.11 ; R15.2@1585,283.5 1585,211.5 1655,211.5 1683.5,211.5 1700,195 v1(1700,170)
  Bottom w10: v1(1010,170) v1(1700,170)
PH: C10.1 D3.1 L1.2 U1.50 U1.51 | length 1154.4
  Top w10: D3.1 D3.1@397.99,801.23 ; C10.1@935,1141.5 935,1140 965,1110 965,1000 ; U1.51 954.49,989.49 965,1000 ; U1.50 974.19,990.81 965,1000
  Top w20: D3.1@397.99,801.23 475,878.23 L1.2 475,1080 v1(555,1160) ; C10.1@935,1141.5 v1(935,1205)
  Bottom w20: v1(555,1160) 655,1160 700,1205 v1(935,1205)
PWM_AH: J4.2 U1.17 | length 1935
  Top w10: U1.17 1171.19,604.91 1171.2,468.8 1245,395 v1(1245,245) ; v1(1770,245) v1(1770,1150)
  Bottom w10: v1(1245,245) v1(1770,245) ; v1(1770,1150) J4.2
PWM_AL: J4.4 U1.18 | length 1762.2
  Top w10: U1.18 1190.89,604.91 1190.9,479.1 1270,400 v1(1270,270) ; v1(1745,270) v1(1745,1050)
  Bottom w10: v1(1270,270) v1(1745,270) ; v1(1745,1050) J4.4
PWM_BH: J4.6 U1.19 | length 1589.4
  Top w10: U1.19 1210.59,604.91 1210.6,489.4 1295,405 v1(1295,295) ; v1(1720,295) v1(1720,950)
  Bottom w10: v1(1295,295) v1(1720,295) ; v1(1720,950) J4.6
PWM_BL: J4.8 U1.20 | length 1416.6
  Top w10: U1.20 1230.29,604.91 1230.3,499.7 1320,410 v1(1320,320) ; v1(1695,320) v1(1695,850)
  Bottom w10: v1(1320,320) v1(1695,320) ; v1(1695,850) J4.8
PWM_CH: J4.10 U1.21 | length 1243.8
  Top w10: U1.21 1249.99,604.91 1250,510 1345,415 v1(1345,345) ; v1(1670,345) v1(1670,750)
  Bottom w10: v1(1345,345) v1(1670,345) ; v1(1670,750) J4.10
PWM_CL: J4.12 U1.22 | length 1071
  Top w10: U1.22 1269.69,604.91 1269.7,520.3 1370,420 v1(1370,370) ; v1(1645,370) v1(1645,650)
  Bottom w10: v1(1370,370) v1(1645,370) ; v1(1645,650) J4.12
SH_A: C5.2 J11.3 Q3.1 Q3.2 Q3.3 Q6.5 R37.1 U1.46 | length 1837.1
  Top w10: Q3.3 Q3.2 Q3.1 ; Q6.5 745,1586.06 745,1425 845,1325 940,1325 1005,1260 1005,1231.5 1040,1196.5 1040,1085 1052.99,1072.01 U1.46
  Top w100: Q6.5 905.79,1770.59 J11.3
  Bottom w10: J11.3 1325,2080.2 R37.1@1325,2006.5
SH_B: C6.2 J11.2 Q4.1 Q4.2 Q4.3 Q7.5 R39.1 U1.41 | length 1659.6
  Top w10: U1.41 1151.49,1200.01 1120,1231.5 1147.69,1259.19 1147.69,1287.69 1160,1300 1250,1300 1270,1320 v1(1270,1355) ; Q4.3 Q4.2 Q4.1 ; v1(1270,1510) 1305,1545 1305,1586.06 Q7.5 Q7.5@1470.2,1751.26 ; J11.2@1465.79,2130.59 J11.2
  Top w100: Q7.5@1470.79,1746.85 J11.2@1470.79,2130.59
  Bottom w10: v1(1270,1355) v1(1270,1510) ; J11.2 1540,2065.2 R39.1@1540,2006.5
SH_C: C7.2 J11.1 Q5.1 Q5.2 Q5.3 Q8.5 R41.1 U1.36 | length 2229.9
  Top w10: C7.2@1225,1231.5 1226.5,1230 v1(1265,1230) 1265,1115 1249.99,1099.99 U1.36 ; Q5.3 Q5.2 Q5.1 ; v1(1820,1335) 1820,1505 1870,1555 1870,1591.06 Q8.5
  Top w100: J11.1 2025.79,1779.41 Q8.5
  Bottom w10: v1(1265,1230) 1320,1230 1330,1220 1425,1220 1500,1295 1780,1295 v1(1820,1335) ; J11.1 1755,2050.2 R41.1@1755,2006.5
SL_A: J5.1 Q6.1 Q6.2 Q6.3 R34.2 U1.44 | length 921.4
  Top w10: Q6.1 Q6.2 Q6.3 ; v1(1080,1275) 1080,1105 1092.4,1092.6 U1.44
  Bottom w10: 938,1387 938,1427 910,1455 R34.2 849.92,1375.08 945,1280 1075,1280 v1(1080,1275)
  other v1: 805,1420 780,1440 805,1460 775,1475 805,1495 775,1510
SL_B: J6.1 Q7.1 Q7.2 Q7.3 R35.2 U1.39 | length 944
  Top w10: U1.39 1190.89,1260.89 1205,1275 v1(1230,1275) ; Q7.1 Q7.2 Q7.3
  Bottom w10: v1(1230,1275) 1285,1275 1308.5,1251.5 1333.5,1251.5 1409.92,1327.92 R35.2 1470,1455 1498,1427 1498,1387
  other v1: 1360,1420 1330,1440 1360,1460 1325,1475 1360,1500 1325,1510
SL_C: J7.1 Q8.1 Q8.2 Q8.3 R36.2 U1.34 | length 1256.2
  Top w10: U1.34 1289.39,1079.39 1315,1105 v1(1315,1200) ; Q8.1 Q8.2 Q8.3
  Bottom w10: v1(1315,1200) 1435,1200 1510,1275 1820,1275 1914.92,1369.92 R36.2 1975,1455 2004,1426 2004,1387
  other v1: 1845,1400 1870,1420 1845,1440 1870,1460 1845,1480 1860,1510
VA_FB: C34.1 J3.7 R37.2 R38.2 U2.3 | length 3571.3
  Top w10: U2.3 133,732 152,713 228,713 275,760 275,825 v1(300,850)
  Bottom w10: C34.1@458.5,850 J3.7 v1(300,850) 250,900 250,1025 270,1045 270,1210 65,1415 65,2190 110,2235 1330,2235 1365,2200 1365,1983.5 1325,1943.5 R38.2@1255,1943.5
VB_FB: C35.1 J3.9 R39.2 R40.2 U2.4 | length 3872.4
  Top w10: U2.4 133,673 150,690 240,690 v1(300,750)
  Bottom w10: C35.1@458.5,750 J3.9 v1(300,750) 225,825 225,1030 250,1055 250,1200 45,1405 45,2200 100,2255 1525,2255 1580,2200 1580,1983.5 1540,1943.5 R40.2@1470,1943.5
VC_FB: C36.1 J3.11 R41.2 R42.2 U2.6 | length 4093.9
  Top w10: U2.6 v1(245,658)
  Bottom w10: C36.1@458.5,650 J3.11 253,650 200,703 200,1035 230,1065 230,1190 25,1395 25,2210 90,2275 1720,2275 1795,2200 1795,1983.5 1755,1943.5 R42.2@1685,1943.5
pads on no net: J3.1 J3.4 J3.10 J3.12 J3.16 J3.18 J3.19 J3.20 J4.5 J4.7 J4.9 J4.14 J4.16 J4.18 J4.19 J4.20 U1.55

## Polygon pours and split planes (outlines as drawn)
SL_C on Top "SL_C_Top" (solid, remove dead copper, pour order 50): 1935,1610 1935,1560 1900,1525 1860,1525 1835,1500 1835,1385 1945,1385 2065,1560 2065,1610
+3.3V on Top "+3.3V-Top" (solid, remove dead copper, pour order 40): 125,1000 125,1255 525,1255 525,1175 360,1175 185,1000
+PVDD on Top "PVDD-Top" (solid, remove dead copper, pour order 43): 180,1600 450,1600 450,1960 180,1960
+PVDD on Top "PVDD1_Top" (solid, remove dead copper, pour order 57): 675,1505 675,1470 895,1250 895,1021 920,984 920,921 890,921 890,983 845,1015 845,1235 620,1460 620,1505
+PVDD on Top "PVDD2_Top" (solid, remove dead copper, pour order 56): 1225,1455 1430,1250 1430,1017 1382,979 1382,921 1393,921 1480,991 1480,1260 1235,1505 1225,1505
SL_B on Top "SL_B_Top" (solid, remove dead copper, pour order 51): 1375,1610 1310,1525 1310,1445 1370,1385 1505,1385 1505,1610
SL_A on Top "SL_A_Top" (solid, remove dead copper, pour order 52): 815,1610 760,1555 760,1435 810,1385 945,1385 945,1610
+PVDD on Top "PVDDA_Top" (solid, remove dead copper, pour order 49): 520,1765 730,1765 730,1560 675,1505 675,1455 565,1455 565,1505 520,1550 520,1765
+PVDD on Top "PVDDB_Top" (solid, remove dead copper, pour order 48): 1080,1765 1290,1765 1290,1560 1235,1505 1235,1455 1125,1455 1125,1505 1080,1550 1080,1765
+PVDD on Top "PVDDC_Top" (solid, remove dead copper, pour order 47): 1640,1765 1850,1765 1850,1560 1795,1505 1795,1455 1685,1455 1685,1505 1640,1550 1640,1765
SH_A on Top "SH_A_Top" (solid, remove dead copper, pour order 42): 585,1865 585,1795 765,1795 805,1755 805,1645 1010,1645 1010,1805 1310,2105 1250,2180
SH_B on Top "SH_B_Top" (solid, remove dead copper, pour order 45): 1145,1865 1145,1790 1325,1790 1360,1755 1360,1645 1570,1645 1570,1865 1520,2140 1435,2165
SH_C on Top "SH_C_Top" (solid, remove dead copper, pour order 46): 1705,1865 1705,1790 1885,1790 1920,1755 1920,1645 2130,1645 2130,1865 1700,2175 1620,2130
GND on Top "GND_TOP" (solid, remove dead copper, pour order 58): 0,2300 2200,2300 2200,-100 0,-100
SL_C on Bottom "SL_C_Bot" (solid, remove dead copper, pour order 53): 1860,1525 1945,1525 1945,1385 1835,1385 1835,1500
+3.3V on Bottom "+3.3V-Bot" (solid, remove dead copper, pour order 44): 100,1170 215,1170 215,1090 190,1090 150,1130 100,1130
+PVDD on Bottom "PVDD_Bot" (solid, remove dead copper, pour order 41): 1850,1875 1850,1600 180,1600 180,1960 650,1960 725,2065 725,2170 925,2170 925,2065 1115,1875
SL_B on Bottom "SL_B_Bot" (solid, remove dead copper, pour order 54): 1310,1525 1440,1525 1440,1385 1370,1385 1310,1445
SL_A on Bottom "SL_A_Bot" (solid, remove dead copper, pour order 55): 760,1525 880,1525 880,1385 810,1385 760,1435
GND on Bottom "GND_BOT" (solid, remove dead copper, pour order 59): 0,0 0,2300 2200,2300 2200,0

## Keep-outs
Keep-Out Layer:
  the board outline again, w10

## Silkscreen, mask and mechanical layers (free items; w line width, h text height)
Silkscreen Top:
  lines w7: 820,605 1430,605 1430,995 820,995 820,605
  lines w10: 80,1035 110,1035 ; 95,1020 95,1050 ; 135,1800 165,1800 ; 150,1785 150,1815 ; 305,1760 335,1760 ; 320,1745 320,1775
  text "PVDD" at 1005,2020 h30
  text "GND" at 535,1870 h50
  text "A" at 1250,1870 h50
  text "PVDD" at 740,1865 h50
  text "B" at 1455,1865 h50
  text "C" at 1650,1865 h50
  text "Motor Drive BoosterPack" at 2035,900 h40 r270
  text "BOOSTXL-DRV8301 REVB" at 2130,900 h40 r270
  text "DRV8301" at 965,540 h50
  text "+3.3V" at 90,20 h30
  text "FAULT" at 355,20 h30
  text "OCTW" at 720,20 h30
M1 Board Outline:
  the board outline again, w10
Drill Drawing:
  lines w1: 0,1970 0.03,1970 ; 0,2270 0.03,2270
  text "Drill Table" at 2750,2100 h60
  text ".Legend" at 2692,1126 h60

## Dimensions
0,0 to 0,2300 on M2 Dimensions
0,2300 to 2200,2300 on M2 Dimensions

## Text inside footprints (layer, text, board x,y; h text height)
L1: M5 Assembly Top "*" at 337.43,1206 h30
U1: M5 Assembly Top "*" at 829.33,690.55 h30
U2: Silkscreen Top "1" at 224.5,781.98 h25 r270; M5 Assembly Top "*" at 210,770 h25 r270
U3: Silkscreen Top "1" at 445.94,408.54 h25 r90; M5 Assembly Top "*" at 444.94,408.54 h25 r90